# EAGLE board clk (EAGLE 7.6.0)
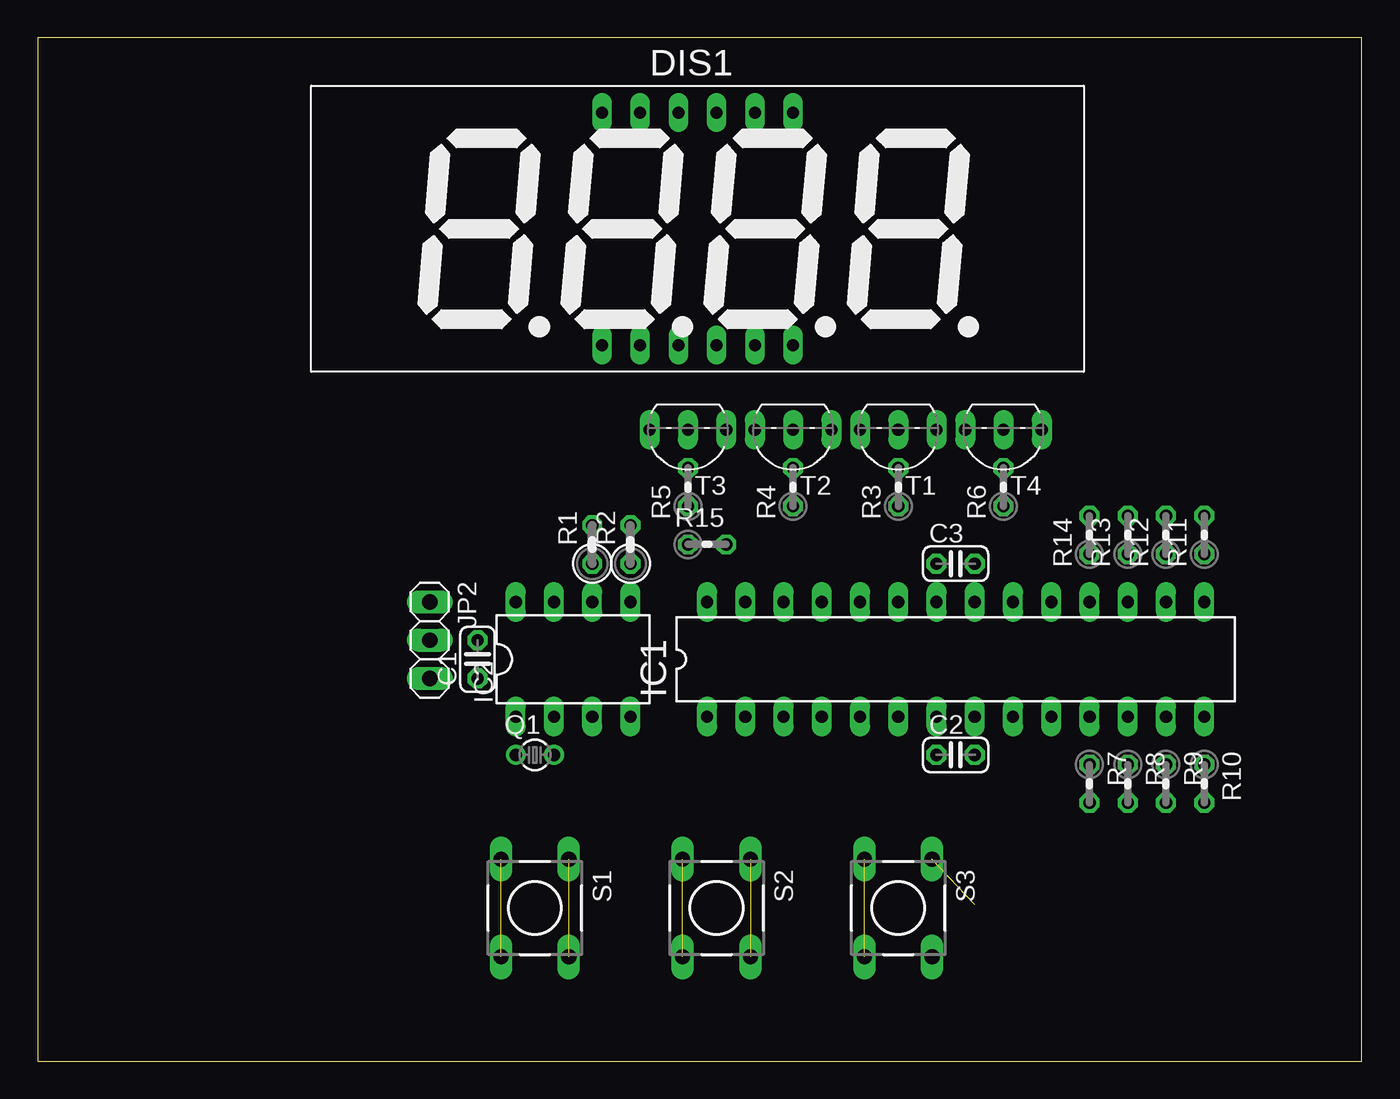
[diagram p0: board, top side]
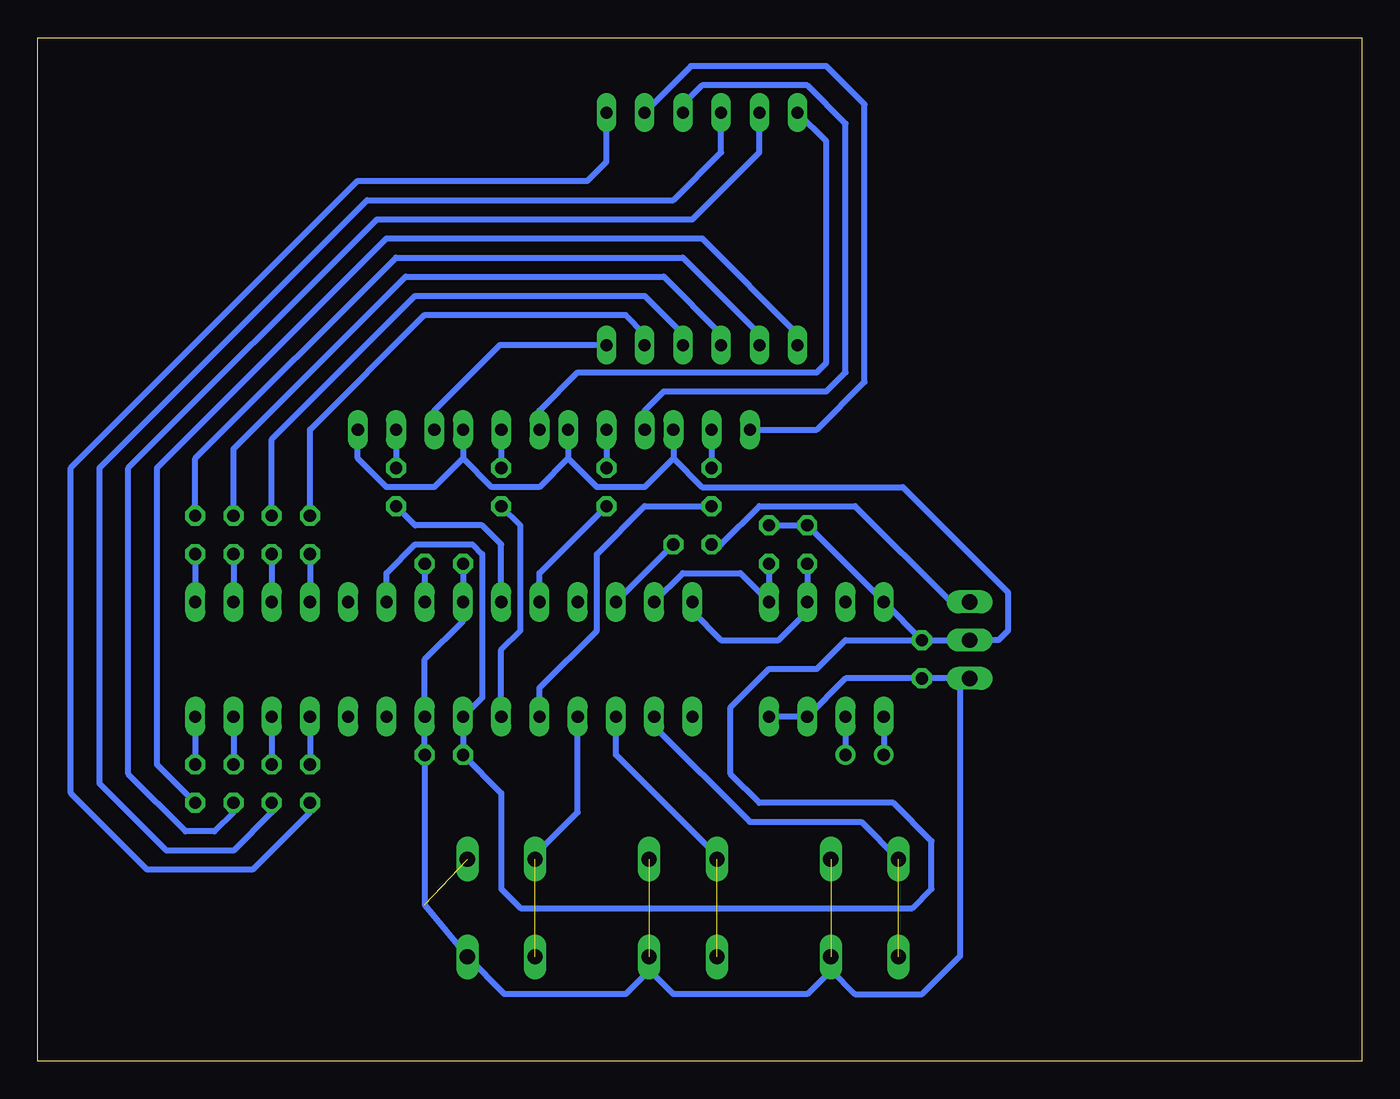
[diagram p1: board, bottom side, seen from below]

Size 87.94 x 67.94 mm. Coordinates in mm from the lower left corner, seen from the top.
Outline: 0,0 87.94,0 87.94,67.94 0,67.94 0,0
Copper layers (1*16): Top 0.035mm / dielectric 1.5mm / Bottom 0.035mm
Design rules "default": minimum track width 10mil, minimum drill 24mil, track to track 8mil, track to pad 8mil, pad to pad 8mil, via to via 8mil, smd to smd 8mil, copper to edge 40mil, drill to drill 8mil, minimum pad ring 10mil, minimum via ring 8mil, stop-mask expansion 4mil, vias tented up to drill 0mil, thermal gap 10mil

## Footprints (pad centres in the part's own frame; a part is rotated, then mirrored left to right if it is on the bottom)
C025-024X044 = drill 0.813 octagon: 1 -1.27,0; 2 1.27,0
FYQ5641 = drill 0.8 long: 1 -6.35,-7.72; 2 -3.81,-7.72; 3 -1.27,-7.72; 4 1.27,-7.72; 5 3.81,-7.72; 6 6.35,-7.72; 7 6.35,7.72; 8 3.81,7.72; 9 1.27,7.72; 10 -1.27,7.72; 11 -3.81,7.72; 12 -6.35,7.72
DIL28-3 = drill 0.813 long: 1 -16.51,-3.81; 2 -13.97,-3.81; 3 -11.43,-3.81; 4 -8.89,-3.81; 5 -6.35,-3.81; 6 -3.81,-3.81; 7 -1.27,-3.81; 8 1.27,-3.81; 9 3.81,-3.81; 10 6.35,-3.81; 11 8.89,-3.81; 12 11.43,-3.81; 13 13.97,-3.81; 14 16.51,-3.81; 15 16.51,3.81; 16 13.97,3.81; 17 11.43,3.81; 18 8.89,3.81; 19 6.35,3.81; 20 3.81,3.81; 21 1.27,3.81; 22 -1.27,3.81; 23 -3.81,3.81; 24 -6.35,3.81; 25 -8.89,3.81; 26 -11.43,3.81; 27 -13.97,3.81; 28 -16.51,3.81
DIL08 = drill 0.813 long: 1 -3.81,-3.81; 2 -1.27,-3.81; 3 1.27,-3.81; 4 3.81,-3.81; 5 3.81,3.81; 6 1.27,3.81; 7 -1.27,3.81; 8 -3.81,3.81
1X03 = drill 1.016 long: 1 -2.54,0; 2 0,0; 3 2.54,0
TC26V = drill 0.813: 1 -1.27,0; 2 1.27,0
0207/2V = drill 0.813 octagon: 1 -1.27,0; 2 1.27,0
0204V = drill 0.813 octagon: 1 -1.27,0; 2 1.27,0
DTS-6 = drill 1 long: 1 -3.25,2.25; 2 3.25,2.25; 3 -3.25,-2.25; 4 3.25,-2.25
TO92-EBC = drill 0.813 long: B 0,-1.27; C 2.54,-1.27; E -2.54,-1.27

## Placement (x,y rotation side)
C1  [C025-024X044]  29.21,26.67 90 top
C2  [C025-024X044]  60.96,20.32 0 top
C3  [C025-024X044]  60.96,33.02 0 top
DIS1  FYQ-5641BX  [FYQ5641]  43.81,55.24 0 top
IC1  MEGA8-P  [DIL28-3]  60.96,26.67 0 top
IC2  DS1307  [DIL08]  35.56,26.67 0 top
JP2  [1X03]  26.04,27.94 270 top
Q1  [TC26V]  33.02,20.32 0 top
R1  [0207/2V]  36.83,34.29 90 top
R2  [0207/2V]  39.37,34.29 90 top
R3  [0204V]  57.15,38.1 90 top
R4  [0204V]  50.16,38.1 90 top
R5  [0204V]  43.18,38.1 90 top
R6  [0204V]  64.14,38.1 90 top
R7  [0204V]  69.85,18.41 270 top
R8  [0204V]  72.39,18.41 270 top
R9  [0204V]  74.93,18.41 270 top
R10  [0204V]  77.47,18.41 270 top
R11  [0204V]  77.47,34.92 90 top
R12  [0204V]  74.93,34.92 90 top
R13  [0204V]  72.39,34.92 90 top
R14  [0204V]  69.85,34.92 90 top
R15  [0204V]  44.45,34.29 0 top
S1  DTS-6  [DTS-6]  33.02,10.16 270 top
S2  DTS-6  [DTS-6]  45.09,10.16 270 top
S3  DTS-6  [DTS-6]  57.15,10.16 270 top
T1  [TO92-EBC]  57.15,40.64 180 top
T2  [TO92-EBC]  50.16,40.64 180 top
T3  [TO92-EBC]  43.18,40.64 180 top
T4  [TO92-EBC]  64.14,40.64 180 top

## Library data of the parts
C1-C3 R1-R15 = rcl
DIS1 = LED 7seg
IC1 = atmel; OC_FARNELL: unknown; OC_NEWARK: unknown
IC2 = adafruit
JP2 = pinhead
Q1 = adafruit; OC_FARNELL: unknown; OC_NEWARK: unknown
S1-S3 = switch-tact
T1-T4 = transistor

## Nets
+5V: C1.2 C2.1 IC1.7 IC1.20 IC2.8 JP2.2 R1.2 R2.2 T1.E T2.E T3.E T4.E
A: DIS1.11 R9.2
B: DIS1.7 R7.2
BUTTON_1: IC1.2 S1.3 S1.4
BUTTON_2: IC1.3 S2.3 S2.4
BUTTON_3: IC1.4 S3.3 S3.4
C: DIS1.4 R13.2
D: DIS1.2 R11.2
D2: DIS1.9 T2.C
D3: DIS1.8 T3.C
DOT: IC1.27 IC2.5 R2.1
DP: DIS1.3 R12.2
E: DIS1.1 R10.2
F: DIS1.10 R8.2
G: DIS1.5 R14.2
GND: C1.1 C2.2 C3.1 IC1.8 IC1.22 IC2.3 IC2.4 JP2.3 S1.1 S1.2 S2.1 S2.2 S3.1 S3.2
N$1: IC2.1 Q1.1
N$2: IC2.2 Q1.2
N$3: C3.2 IC1.21
N$4: JP2.1 R15.1
N$5: DIS1.6 T4.C
N$6: IC1.28 IC2.6 R1.1
N$7: IC1.23 R6.1
N$8: IC1.6 R3.1
N$9: R5.2 T3.B
N$10: R3.2 T1.B
N$11: R4.2 T2.B
N$12: R6.2 T4.B
N$14: IC1.24 R4.1
N$15: IC1.5 R5.1
N$16: IC1.11 R7.1
N$17: IC1.12 R8.1
N$18: IC1.13 R9.1
N$19: IC1.14 R10.1
N$20: IC1.15 R11.1
N$21: IC1.16 R12.1
N$22: IC1.17 R13.1
N$23: DIS1.12 T1.C
N$24: IC1.18 R14.1
N$25: IC1.26 R15.2

## Tracks (layer width: path | path; a pad name or v marks a point on that pad's centre or on a via)
+5V
  Bottom 0.406: C1.2 JP2.2 24.13,27.94 23.5,28.57 23.5,31.11 30.48,38.1 43.81,38.1 45.72,40.01 | R2.2 R1.2 IC2.8 C1.2 | IC1.20 64.77,32.38 62.87,34.29 59.05,34.29 58.42,33.66 58.42,24.13 IC1.7 C2.1 57.15,17.78 57.15,11.43 55.88,10.16 29.84,10.16 28.57,11.43 28.57,14.61 31.11,17.14 40.01,17.14 41.91,19.05 41.91,23.5 39.37,26.04 36.2,26.04 34.29,27.94 C1.2 | T3.E 45.72,40.01 | 45.72,40.01 47.62,38.1 50.8,38.1 52.7,40.01 | T2.E 52.7,40.01 | 52.7,40.01 54.61,38.1 57.78,38.1 59.69,40.01 | T1.E 59.69,40.01 | 59.69,40.01 61.59,38.1 64.77,38.1 66.67,40.01 T4.E
A
  Bottom 0.406: R9.2 74.93,16.51 76.2,15.24 78.11,15.24 81.92,19.05 81.92,39.37 65.41,55.88 44.45,55.88 40.01,60.33 DIS1.11
B
  Bottom 0.406: R7.2 69.85,16.51 73.66,12.7 80.64,12.7 85.72,17.78 85.72,39.37 66.67,58.42 51.44,58.42 50.16,59.69 DIS1.7
BUTTON_1  (1 unrouted)
  Bottom 0.406: IC1.2 46.99,22.23 40.64,15.88 33.23,15.88 S1.3
BUTTON_2  (1 unrouted)
  Bottom 0.406: S2.3 42.84,13.62 49.53,20.32 IC1.3
BUTTON_3  (1 unrouted)
  Bottom 0.406: S3.3 54.9,13.68 52.07,16.51 IC1.4
C
  Bottom 0.406: R13.2 72.39,41.27 62.87,50.8 47.62,50.8 45.09,48.26 DIS1.4
D
  Bottom 0.406: R11.2 77.47,40.01 64.14,53.34 45.09,53.34 40.01,48.26 DIS1.2
D2
  Bottom 0.406: T2.C 47.62,43.18 46.35,44.45 35.56,44.45 34.29,45.72 34.29,62.23 36.83,64.77 43.81,64.77 45.09,63.5 DIS1.9
D3
  Bottom 0.406: T3.C 36.2,41.91 33.02,45.09 33.02,63.5 35.56,66.04 44.55,66.04 DIS1.8
DOT
  Bottom 0.406: R2.1 IC2.5 41.27,32.38 45.09,32.38 IC1.27
DP
  Bottom 0.406: R12.2 74.93,40.64 63.5,52.07 46.35,52.07 42.55,48.26 DIS1.3
E
  Bottom 0.406: R10.2 80.01,19.68 80.01,39.37 64.77,54.61 43.81,54.61 37.47,48.26 DIS1.1
F
  Bottom 0.406: R8.2 72.39,16.51 74.93,13.97 79.38,13.97 83.82,18.41 83.82,39.37 66.04,57.15 45.72,57.15 42.55,60.33 DIS1.10
G
  Bottom 0.406: R14.2 69.85,41.91 62.23,49.53 48.9,49.53 47.62,48.26 DIS1.5
GND  (3 unrouted)
  Bottom 0.406: IC2.4 IC2.3 34.29,25.4 C1.1 JP2.3 26.67,24.77 26.67,6.99 29.21,4.45 33.66,4.45 35.27,6.06 S1.2 35.27,6 36.83,4.45 45.72,4.45 47.34,6.06 S2.2 47.34,6 48.9,4.45 56.94,4.45 S3.2 62.23,10.38 C2.2 IC1.8 62.23,26.67 59.69,29.21 IC1.22 C3.1
N$1
  Bottom 0.406: IC2.1 Q1.1
N$2
  Bottom 0.406: IC2.2 Q1.2
N$3
  Bottom 0.406: C3.2 IC1.21
N$4
  Bottom 0.406: JP2.1 27.3,30.48 33.66,36.83 40.01,36.83 42.55,34.29 R15.1
N$5
  Bottom 0.406: DIS1.6 57.25,47.52 61.59,43.18 T4.C
N$6
  Bottom 0.406: R1.1 IC2.6 36.83,29.84 38.73,27.94 42.55,27.94 44.45,29.84 IC1.28
N$7
  Bottom 0.406: IC1.23 57.15,34.29 58.42,35.56 62.87,35.56 R6.1
N$8
  Bottom 0.406: IC1.6 57.15,27.3 55.88,28.57 55.88,35.56 R3.1
N$9
  Bottom 0.406: T3.B R5.2
N$10
  Bottom 0.406: T1.B R3.2
N$11
  Bottom 0.406: T2.B R4.2
N$12
  Bottom 0.406: T4.B R6.2
N$14
  Bottom 0.406: IC1.24 54.61,32.38 R4.1
N$15
  Bottom 0.406: IC1.5 54.61,24.77 50.8,28.57 50.8,33.66 47.62,36.83 R5.1
N$16
  Bottom 0.406: IC1.11 R7.1
N$17
  Bottom 0.406: IC1.12 R8.1
N$18
  Bottom 0.406: IC1.13 R9.1
N$19
  Bottom 0.406: IC1.14 R10.1
N$20
  Bottom 0.406: R11.1 IC1.15
N$21
  Bottom 0.406: R12.1 IC1.16
N$22
  Bottom 0.406: R13.1 IC1.17
N$23
  Bottom 0.406: T1.C 54.61,43.18 52.07,45.72 36.2,45.72 35.56,46.35 35.56,61.06 DIS1.12
N$24
  Bottom 0.406: R14.1 IC1.18
N$25
  Bottom 0.406: IC1.26 R15.2